# EAGLE board v2 (EAGLE 6.6.0)
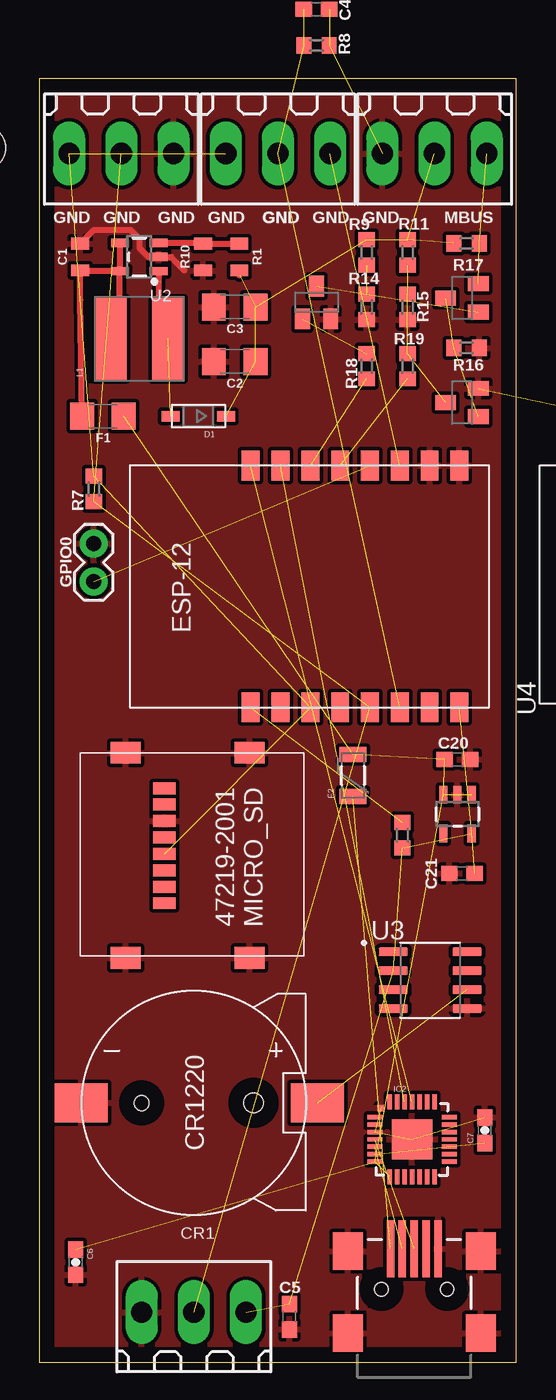
[diagram p0: board, top side]
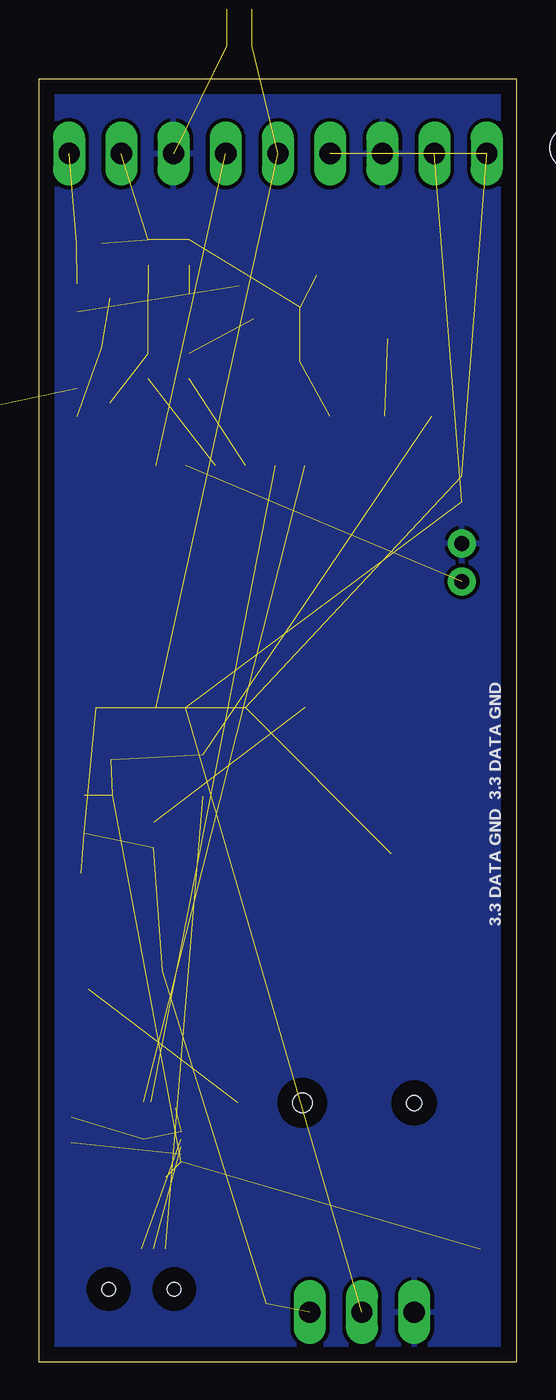
[diagram p1: board, bottom side, seen from below]

Size 32 x 86 mm. Coordinates in mm from the lower left corner, seen from the top.
Outline: 32,0 32,86 0,86 0,0 32,0
Copper layers (1*16): Top 0.035mm / dielectric 1.5mm / Bottom 0.035mm
Design rules "default *": minimum track width 8mil, minimum drill 24mil, track to track 8mil, track to pad 8mil, pad to pad 8mil, via to via 8mil, smd to smd 8mil, copper to edge 40mil, drill to drill 8mil, minimum pad ring 10mil, minimum via ring 8mil, stop-mask expansion 0.075mm, vias tented up to drill 0.6mm, thermal gap 10mil
Net classes: 0 default: width 0.203 mm, drill 0.6 mm, clearance 0.203 mm; 1 power: width 0.381 mm, drill 0.6 mm, clearance 0.254 mm; 2 gnd: width 0.254 mm, drill 0.6 mm, clearance 0.254 mm; 3 thin_power2: width 0.254 mm, clearance 0.254 mm
Holes 2.8 mm at -3.66,81.38

## Footprints (pad centres in the part's own frame; a part is rotated, then mirrored left to right if it is on the bottom)
0805 = smd 0.8 x 1.2: 1 -0.9,0; 2 0.9,0
1206 = smd 1.6 x 1.8: 1 -1.4,0; 2 1.4,0
C0603 = smd 1.1 x 1: 1 -0.85,0; 2 0.85,0
0603-CAP = smd 1.1 x 1: 1 -0.85,0; 2 0.85,0
CR1220SMD = smd 3.54 x 2.6: P+ 8.3,0; P- -7.55,0 | hole 1: -3.5,0 | hole 1.3: 4,0
SOD-123 = smd 1.2 x 0.7: A 1.85,0; C -1.85,0
PTC-1206 = smd 1 x 1.8: 1 -1.4,0; 2 1.4,0
1X02 = drill 1.016 pad 1.88: 1 0,0; 2 2.54,0
MLP28 = smd 1 x 0.3: 1 -2.5,1.5; 2 -2.5,1; 3 -2.5,0.5; 4 -2.5,0; 5 -2.5,-0.5; 6 -2.5,-1; 7 -2.5,-1.5; 15 2.5,-1.5; 16 2.5,-1; 17 2.5,-0.5; 18 2.5,0; 19 2.5,0.5; 20 2.5,1; 21 2.5,1.5 | smd 0.3 x 1: 8 -1.5,-2.5; 9 -1,-2.5; 10 -0.5,-2.5; 11 0,-2.5; 12 0.5,-2.5; 13 1,-2.5; 14 1.5,-2.5; 22 1.5,2.5; 23 1,2.5; 24 0.5,2.5; 25 0,2.5; 26 -0.5,2.5; 27 -1,2.5; 28 -1.5,2.5 | smd 2.7 x 2.7: EXP 0,0 | smd 0.435 x 0.435: M -2.103,2.103
CR54 = smd 5.5 x 2.15: P$1 0,1.92; P$2 0,-1.92
47219-2001_MICROSD = smd 1.45 x 2: P$1 0,0; P$2 13.75,0; P$3 0,8.3; P$4 13.75,8.3 | smd 0.8 x 1.5: PIN1 10.08,2.6; PIN2 8.98,2.6; PIN3 7.88,2.6; PIN4 6.78,2.6; PIN5 5.68,2.6; PIN6 4.58,2.6; PIN7 3.48,2.6; PIN8 2.38,2.6
SOT23-BEC = smd 1 x 1.4: B -0.95,-1.1; C 0,1.1; E 0.95,-1.1
R0603 = smd 1 x 1.1: 1 -0.85,0; 2 0.85,0
180-3 = drill 1.422 long: 1 -3.5,0; 2 0,0; 3 3.5,0
SOT23-5 = smd 0.55 x 1.2: 1 -0.95,-1.3; 2 0,-1.3; 3 0.95,-1.3; 4 0.95,1.3; 5 -0.95,1.3
SOT-23-5 = smd 0.55 x 1.2: 1 -0.95,-1.3; 2 0,-1.3; 3 0.95,-1.3; 4 0.95,1.3; 5 -0.95,1.3
SOIC127P600X175-8N = smd 1.97 x 0.59: 1 -2.475,1.905; 2 -2.475,0.635; 3 -2.475,-0.635; 4 -2.475,-1.905; 5 2.475,-1.905; 6 2.475,-0.635; 7 2.475,0.635; 8 2.475,1.905
XCVR_ESP8266-12E/ESP-12E = smd 2 x 1.2: 1 -7.5,7; 2 -7.5,5; 3 -7.5,3; 4 -7.5,1; 5 -7.5,-1; 6 -7.5,-3; 7 -7.5,-5; 8 -7.5,-7; 15 7.5,-7; 16 7.5,-5; 17 7.5,-3; 18 7.5,-1; 19 7.5,1; 20 7.5,3; 21 7.5,5; 22 7.5,7 | smd 1.1 x 1.7: 9 -5,-8.5; 10 -3,-8.5; 11 -1,-8.5; 12 1,-8.5; 13 3,-8.5; 14 5,-8.5
ESP8266-ESP12 = smd 2 x 1.2: 1 16.2,2; 2 16.2,4; 3 16.2,6; 4 16.2,8; 5 16.2,10; 6 16.2,12; 7 16.2,14; 8 16.2,16; 9 0,16; 10 0,14; 11 0,12; 12 0,10; 13 0,8; 14 0,6; 15 0,4; 16 0,2
USB-MINIB-CISECO = smd 3.8 x 0.5: D+ 7.9,0; D- 7.9,0.8; GND 7.9,-1.6; ID 7.9,-0.8; VBUS 7.9,1.6 | smd 2.5 x 2: MTN1 2.25,4.45; MTN2 7.75,4.45; MTN3 2.25,-4.45; MTN4 7.75,-4.45 | hole 0.9: 5.2,2.2; 5.2,-2.2

## Placement (x,y rotation side)
C1  4.7u  [0805]  2.74,74.07 90 top
C2  10u  [1206]  13.11,67.06 180 top
C3  1u  [1206]  13.11,70.71 180 top
C4  100nF  [C0603]  18.59,90.68 180 top  (outside the outline)
C5  100nF  [C0603]  16.76,3.05 90 top
C6  100nF  [0603-CAP]  2.44,6.71 270 top
C7  100nF  [0603-CAP]  29.87,15.54 90 top
C20  1µ  [C0603]  28.04,40.39 0 top
C21  1µ  [C0603]  28.35,32.77 180 top
CR1  CR1220SMD  [CR1220SMD]  10.36,17.37 0 top
D1  SS14  [SOD-123]  10.67,63.4 180 top
F1  6V/0.5A  [1206]  4.27,63.4 180 top
F2  PTCSMD  [PTC-1206]  21.03,39.32 90 top
GPIO0  [1X02]  3.66,54.86 270 top
IC2  CP210X_USB_UART  [MLP28]  24.99,14.94 0 top
L1  10uH  [CR54]  6.71,68.58 90 top
LOGO1  OSHW_LOGO_6MILX0200-NT  [OSHW_6X200_NOTEXT]  51.75,13.17 0 bottom  (outside the outline)
MICRO_SD  47219-2001_MICROSD  [47219-2001_MICROSD]  5.79,40.84 270 top
Q1  [SOT23-BEC]  18.59,71.02 0 top
Q2  [SOT23-BEC]  28.35,64.31 90 top
R1  1M  [0805]  13.41,74.07 270 top
R3  10k  [R0603]  24.35,35.32 270 top
R7  4.7K  [R0603]  3.66,58.52 90 top
R8  100k  [R0603]  18.59,88.24 0 top
R9  39k  [R0603]  21.95,74.37 90 top
R10  37k  [0805]  10.97,74.07 90 top
R11  33k  [R0603]  24.69,74.37 90 top
R14  22k  [R0603]  21.95,70.71 90 top
R15  3k3  [R0603]  24.69,70.71 90 top
R16  82r  [R0603]  28.65,67.97 180 top
R17  220k  [R0603]  28.65,74.98 180 top
R18  1k  [R0603]  21.95,66.75 270 top
R19  1k  [R0603]  24.69,66.75 270 top
T1  [SOT23-BEC]  28.35,71.32 90 top
T9  [180-3]  26.5,81 180 top
U1  AP2112  [SOT23-5]  28.04,36.73 180 top
U2  AP3015  [SOT-23-5]  6.71,74.07 90 top
U3  DS3231MZ+TRL  [SOIC127P600X175-8N]  26.21,25.6 0 top
U4  ESP8266-12E/ESP-12E  [XCVR_ESP8266-12E/ESP-12E]  49.07,52.12 90 top  (outside the outline)
U$1  ESP8266_ESP-12  [ESP8266-ESP12]  30.18,43.89 90 top
U$10  USB-MINIB-5PIN  [USB-MINIB-CISECO]  25.15,-0.3 90 top
X1  [180-3]  5.5,81 180 top
X2  [180-3]  10.36,3.35 0 top
X7  [180-3]  16,81 180 top

## Library data of the parts
C1 = SparkFun-Capacitors; PROD_ID: CAP-11625
C2 C3 = SparkFun-Capacitors; PROD_ID: CAP-09822
C4 C5 C20 C21 = resistor
C6 C7 F2 GPIO0 L1 U1 = SparkFun
CR1 = IotaWatt_parts; MPN: Harwin S8411-45R
D1 = adafruit
F1 = SparkFun-Fuses; PROD_ID: RES-08585
IC2 = SparkFun-DigitalIC
LOGO1 = ohw-logo
MICRO_SD = MOLEX 47219-2001
Q1 Q2 T1 = transistor
R1 R10 = SparkFun-Resistors
R3 R7-R9 R11 R14-R19 = rcl
T9 X1 X2 X7 = con-weidmueller-sl35; OC_FARNELL: unknown; OC_NEWARK: unknown
U2 = dword1511-pmic-dcdc
U3 = DS3231MZ_TRL; AVAILABILITY: Warning; DESCRIPTION: Real Time Clock (RTC) IC Clock/Calendar I²C, 2-Wire Serial 8-SOIC (0.154, 3.90mm Width); MF: Maxim Integrated; MP: DS3231MZ+TRL; PACKAGE: SOIC-8 Maxim; PRICE: None; PURCHASE-URL: https://pricing.snapeda.com/search/part/DS3231MZ+TRL/?ref=eda
U4 = ESP8266-12E_ESP-12E; AVAILABILITY: Unavailable; DESCRIPTION: This WiFi module has a 32-bit MCU micro and clock speeds supporting 80 MHz or 160 MHz. Supports the RTOS and integrated Wi-Fi MAC/BB/RF/PA/LNA, and has an on-board antenna.; MF: AI-Thinker; MP: ESP8266-12E/ESP-12E; PACKAGE: None; PRICE: None
U$1 = ESP8266-ESP12
U$10 = Ciseco USB miniB_Updated

## Nets
3.3V: C5.2 C21.1 MICRO_SD.PIN4 R3.2 R7.2 U1.5 U3.2 U$1.11 U$1.16 X1.3 X2.3 X7.3
5V: C1.1 F1.2 L1.P$1 U2.4 U2.5
5V1 [power]: C6.1 C20.1 F1.1 F2.2 IC2.7 IC2.8 U1.1 U1.3
24V: C2.1 C3.1 D1.C R1.2 R9.2 R11.2 R17.2 T9.2
D12: R19.2 U$1.5
D14: R18.2 U$1.6
D+: IC2.4 U$10.D+
D-: IC2.5 U$10.D-
DS18B20: R7.1 U$1.13 X1.2 X2.2
DTR: IC2.28
GND [power]: C1.2 C2.2 C3.2 C4.1 C5.1 C6.2 C7.2 C20.2 C21.2 CR1.P- GPIO0.1 IC2.3 IC2.EXP IC2.M MICRO_SD.P$1 MICRO_SD.P$2 MICRO_SD.P$3 MICRO_SD.P$4 MICRO_SD.PIN6 Q1.E Q2.E R8.2 R10.1 R14.1 R15.1 R16.1 T9.3 U1.2 U2.2 U3.5 U4.15 U$1.1 U$1.2 U$10.GND U$10.MTN1 U$10.MTN2 U$10.MTN3 U$10.MTN4 X1.1 X2.1
GPIO2: U$1.3 X7.1
GPIO12: MICRO_SD.PIN7
GPIO13: MICRO_SD.PIN3
GPIO14: MICRO_SD.PIN5
GPIO15: MICRO_SD.PIN2
N$1: C7.1 IC2.6
N$2: F2.1 U$10.VBUS
N$4: R1.1 R10.2 U2.3
N$5: D1.A L1.P$2 U2.1
N$6: CR1.P+ U3.6
N$13: R17.1 T1.E T9.1
N$16: Q2.B R16.2 T1.C
N$18: Q1.C R9.1 R14.2 T1.B
N$21: Q2.C R11.1 R15.2 R19.1
N$25: Q1.B R18.1
N$29: GPIO0.2 U$1.4
N$40: R3.1 U$1.9
PULSE: C4.2 R8.1 U$1.14 X7.2
RXD: IC2.25 U$1.8
SCL: U3.8
SDA: U3.7
TXD: IC2.26 U$1.7
VCC: U4.8

## Tracks (layer width: path | path; a pad name or v marks a point on that pad's centre or on a via)
3.3V  (11 unrouted)
5V
  Top 0.406: U2.5 5.41,73.17 C1.1 2.74,71.2 F1.2 | L1.P$1 5.41,68.58 U2.5 | U2.4 U2.5
5V1  (7 unrouted)
24V  (7 unrouted)
  Top 0.406: 13.41,72.85 R1.2
D12  (1 unrouted)
D14  (1 unrouted)
D+  (1 unrouted)
D-  (1 unrouted)
DS18B20  (3 unrouted)
GND  (6 unrouted)
  Top 0.406: U2.2 8.84,74.07 9.74,73.17 | C1.2 3.67,75.89 6.1,75.89 6.71,75.29 6.71,74.68 7.32,74.07
  pour Bottom (isolate 0.254): 0,0 32,0 32,86 0,86 0,27.58 0,12.5
  pour Top (isolate 0.254): 0,0 32,0 32,86 0,86 0,27.58 0,12.5
GPIO2  (1 unrouted)
N$1  (1 unrouted)
N$2  (1 unrouted)
N$4
  Top 0.406: U2.3 10.92,75.02 R10.2 R1.1
N$5  (1 unrouted)
  Top 0.406: U2.1 8.01,69.2 L1.P$2
N$6  (1 unrouted)
N$13  (2 unrouted)
N$16  (2 unrouted)
N$18  (3 unrouted)
N$21  (3 unrouted)
N$25  (1 unrouted)
N$29  (1 unrouted)
N$40  (1 unrouted)
PULSE  (3 unrouted)
RXD  (1 unrouted)
TXD  (1 unrouted)

## Text on the board
_tsilk: GND | GND | GND | GND | GND | GND | GND | GND | MBUS
_bsilk: 3.3 DATA GND 3.3 DATA GND | Open-Hardware | Made in UK | North Wales | Designed in | WiFi MBUS Reader v1.0 | OpenEnergyMonitor.org